# Altium PCB Copy of STM32_PCB.PcbDoc
Units mil, origin at the board's own origin, x right, y up, seen from the top; angles counter-clockwise.
Board outline 1427.35 x 1387.98 mil, 4 copper layers (L1(SIGNAL), L2(GND), L3(GND), L4(SIGNAL)), stack 59.764 mil thick; 35 components, 27 nets, 167 pads, 73 vias.
Unrouted connection lines stored in the file: 8.
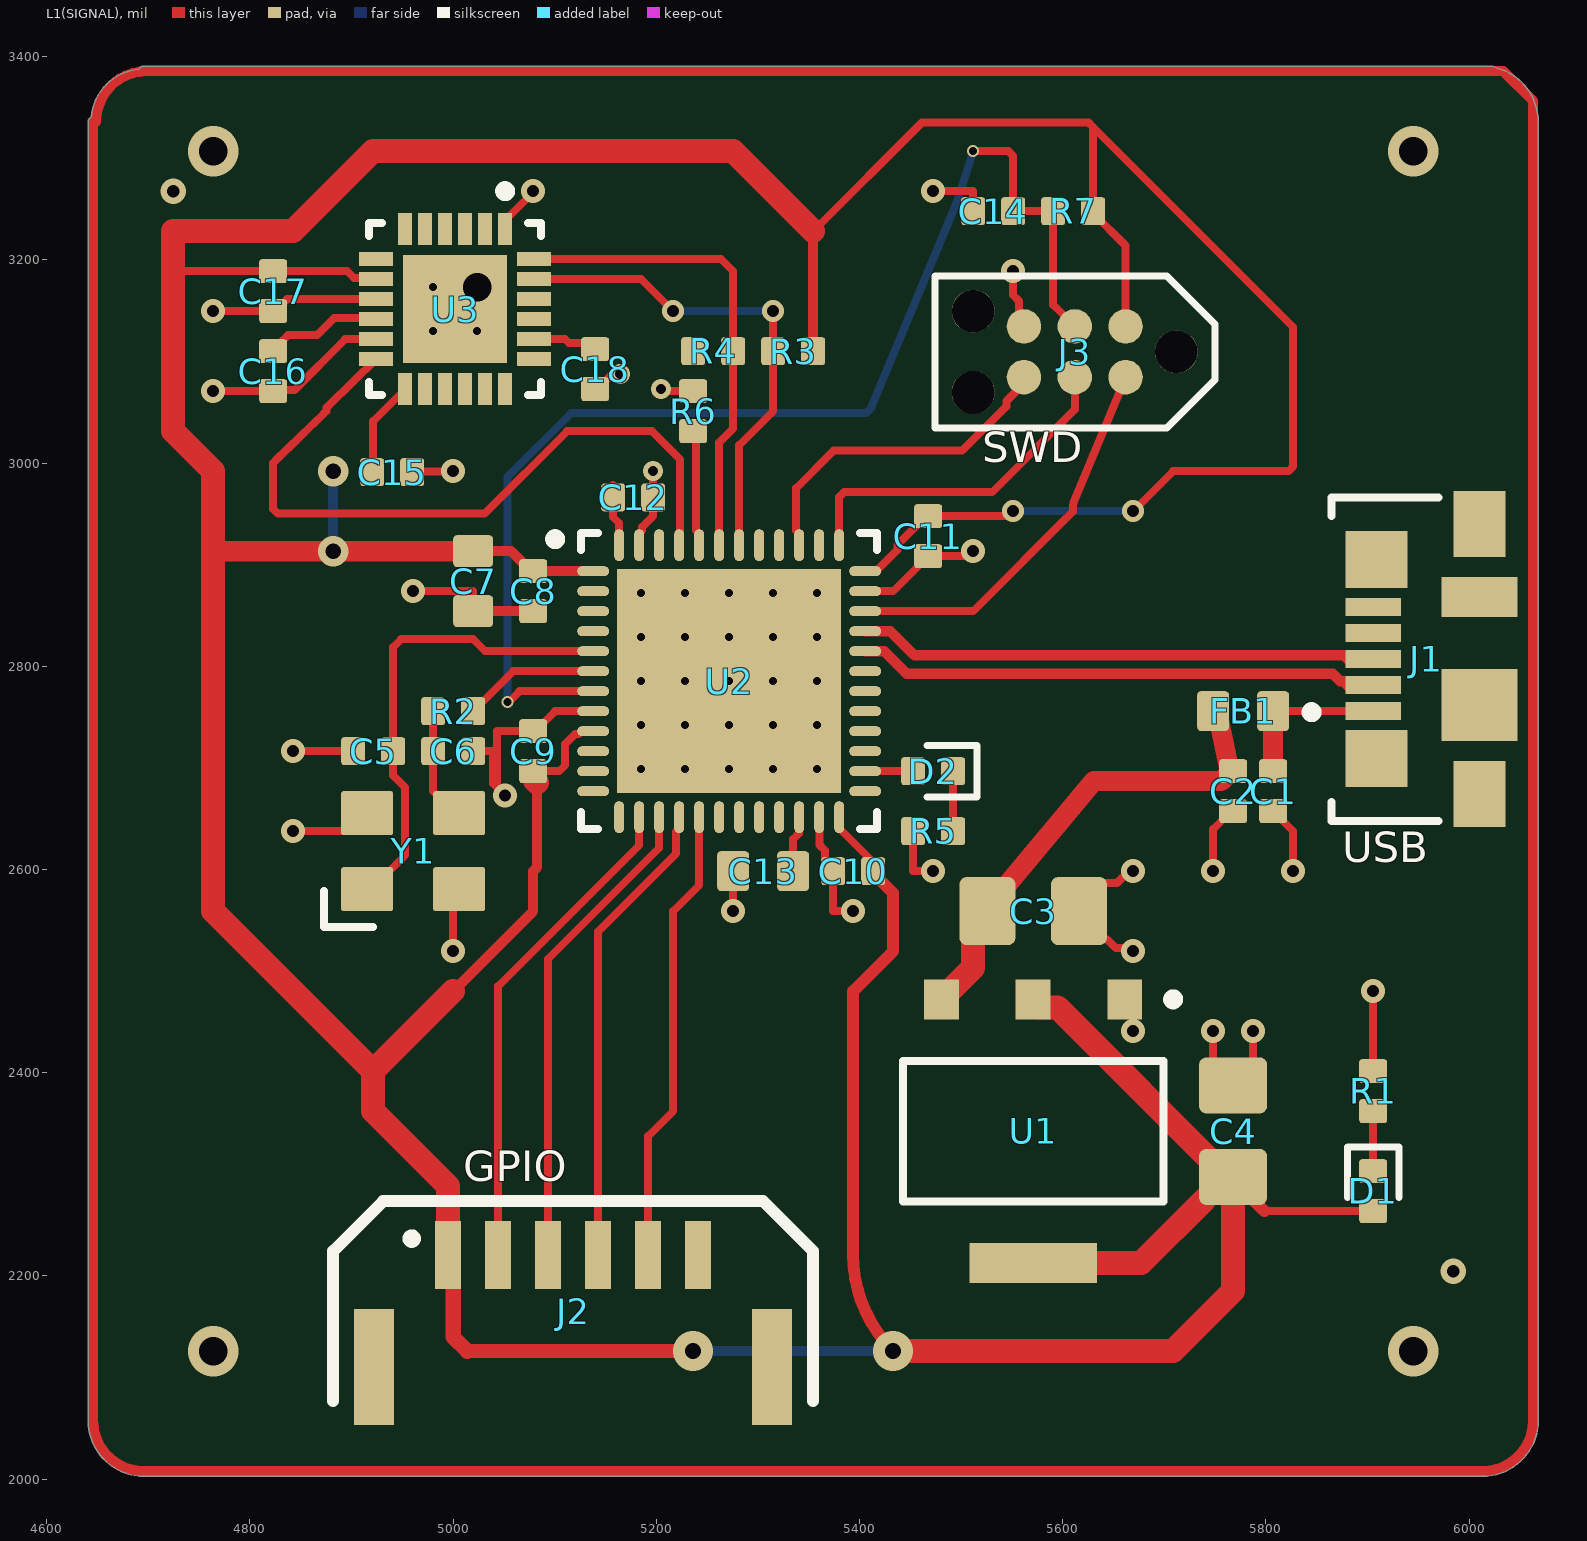
[diagram p0: L1(SIGNAL) view]
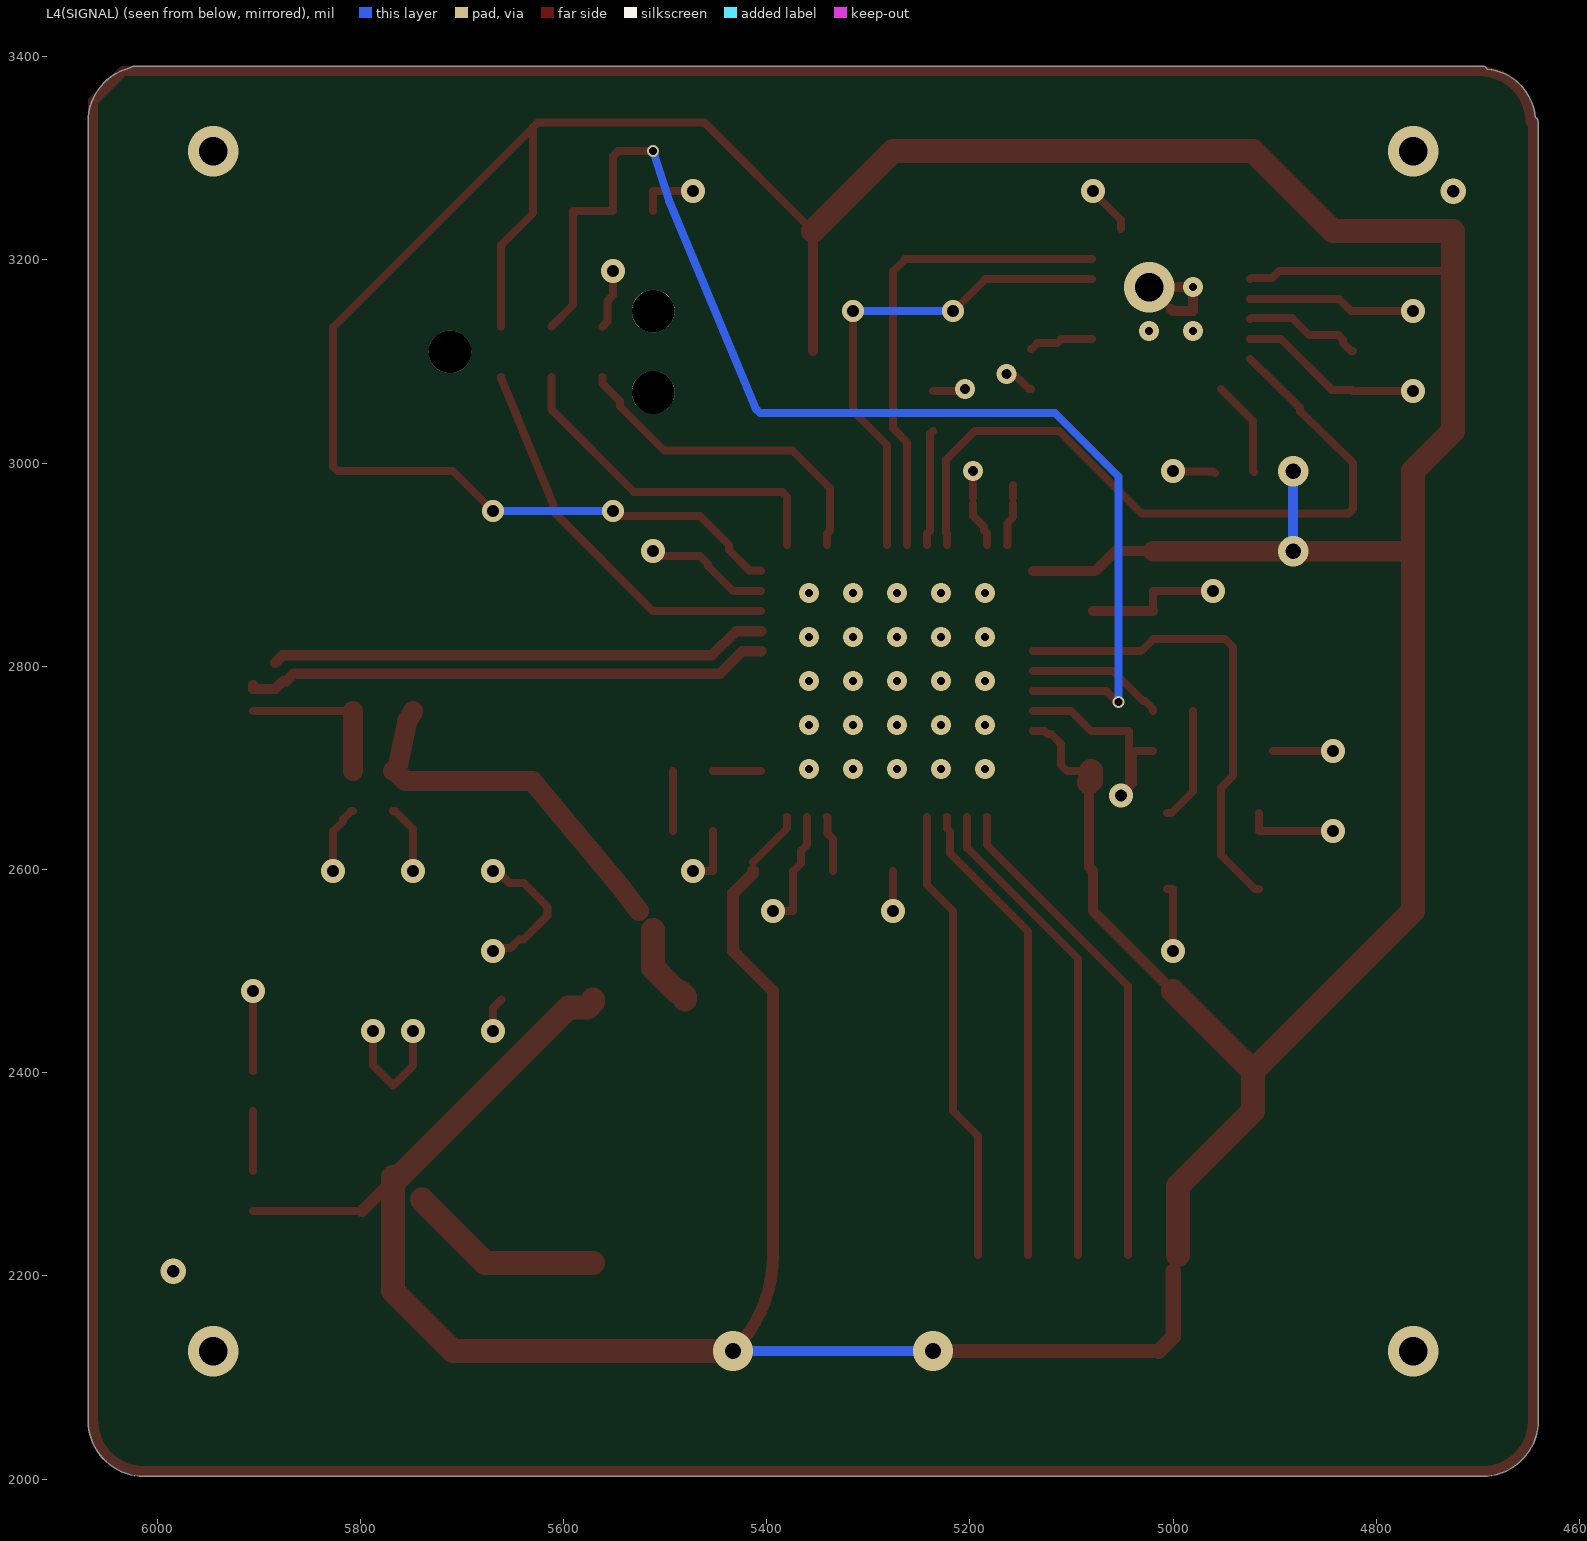
[diagram p1: L4(SIGNAL) view, seen from below]
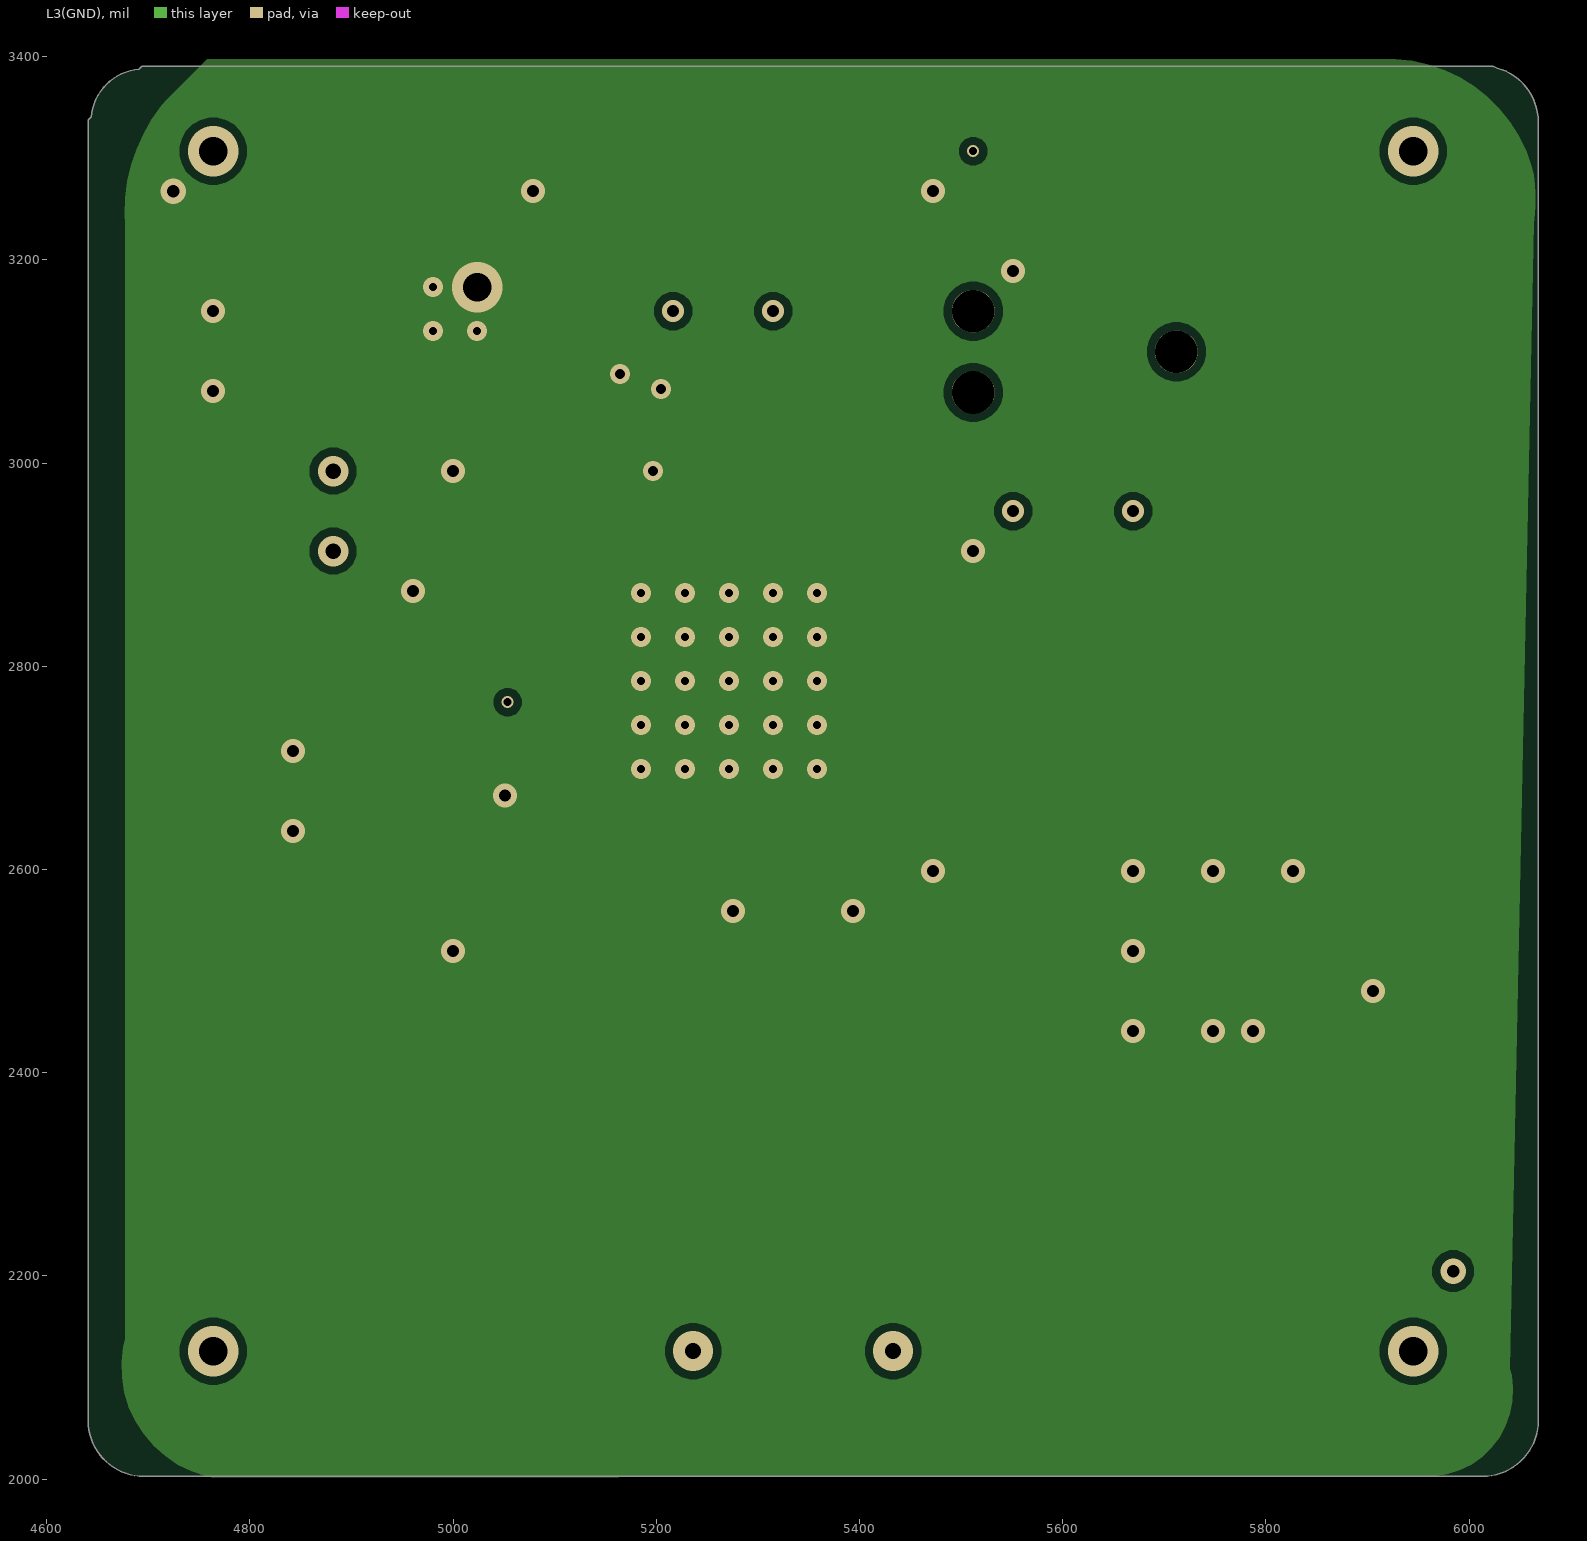
[diagram p2: L3(GND)]

## Layer stack, top to bottom
Top Solder: solder mask 1, SM-001, Dk 4
L1(SIGNAL): signal copper 0.3543
Dielectric 1: prepreg 7.874, PP-017, Dk 4.6
L2(GND): signal copper 0.689
Dielectric 3: core 41.9291, Core-039, Dk 4.6
L3(GND): signal copper 0.689
Dielectric 5: prepreg 7.874, PP-017, Dk 4.6
L4(SIGNAL): signal copper 0.3543
Bottom Solder: solder mask 1, SM-001, Dk 4

## Board outline
4640.65,2057.87 4640.65,3335.83 cw(c4645.67,3335.83) 4643.61,3340.4 cw(c4695.67,3335.83) 4691.1,3387.89 cw(c4695.67,3385.83) 4695.67,3390.84 6023.62,3390.84 6027.61,3388.86 cw(c6012.99,3335.83) 6068.01,3335.83 6068.01,2057.87 cw(c6012.99,2057.87) 6012.99,2002.86 4695.67,2002.86 cw(c4695.67,2057.87)

## Design rules (kind name [scope] priority, off if disabled: settings)
Clearance [All] p1: gap=7.87 ignorepadtopadclearanceinfootprint=FALSE
DiffPairsRouting [All] p1: maxlimit=7.99 minlimit=7.99 mostfreqgap=7.99 toplayer_minwidth=10.24 toplayer_maxwidth=10.24 toplayer_prefwidth=10.24 midlayer1_minwidth=10.24 midlayer1_maxwidth=10.24 midlayer1_prefwidth=10.24 midlayer2_minwidth=10.24 midlayer2_maxwidth=10.24 midlayer2_prefwidth=10.24 bottomlayer_minwidth=10.24 bottomlayer_maxwidth=10.24 bottomlayer_prefwidth=10.24 maxuncoupledlength=500
PolygonConnect [All] p1: connectstyle=Direct reliefconductorwidth=10 reliefentries=4 polygonreliefangle="90 Angle" airgapwidth=10
RoutingVias [All] p1: holewidth=11.81 width=27.56 viastyle="Through Hole" minholewidth=9.84 minwidth=21.65 maxholewidth=15.75 maxwidth=35.43
SolderMaskExpansion [All] p1: expansion=4 istentingtop=FALSE
SupplyNets "Schematic Supply Nets_4" [InNet('GND')] p1: voltage=0.000
SupplyNets "Schematic Supply Nets_3" [InNet('3V3')] p2: voltage=0.000
SupplyNets "Schematic Supply Nets_2" [InNet('VBUS')] p3: voltage=0.000
SupplyNets "Schematic Supply Nets_1" [InNet('+5V')] p4: voltage=0.000
UnRoutedNet [All] p1: checkbadconnections=TRUE
Width [All] p1: maxlimit=39.37 minlimit=7.87 preferedwidth=10 midlayer1_minwidth=10 midlayer1_maxwidth=10 midlayer2_minwidth=10 midlayer2_maxwidth=10 minimp=50.000000 maximp=50.000000 favimp=50.000000
28 further rules are at their usual default settings.

## Classes and differential pairs
differential pair class *DIFF_USB: USB_D
component class STM32_SCHEMATIC: 33333 C1 C2 C3 C4 C5 C6 C7 C9 C10 C11 C12 C13 C14 C15 C16 C17 D1 D2 FB1 J1 J3 R1 R2 R3 R4 R5 R6 R7 U1 U2 U3 Y1
differential pair USB_D: +USB_D_P -USB_D_N

## Components (designator, comment, footprint, x,y, rotation, side; value= is the part's Value field where it differs from the comment)
C1 "2u2" CAP_0402 5807.09,2677.16 r270 top
C2 "2u2" CAP_0402 5767.72,2677.16 r270 top
C3 "22u" CAP_0805 5570.87,2559.06 r180 top
C4 "22u" CAP_0805 5767.72,2342.52 r270 top
C5 "C0402" CAP_0402 4921.26,2716.54 r180 top
C6 "C0402" CAP_0402 5000,2716.54 r0 top
C7 "2.2u" CAP_0603 5019.69,2883.86 r270 top
C8 "100n" CAP_0402 5078.74,2874.02 r270 top
C9 "100n" CAP_0402 5078.74,2716.54 r90 top
C10 "100n" CAP_0402 5393.7,2598.43 r180 top
C11 "100n" CAP_0402 5467.52,2928.15 r270 top
C12 "100n" CAP_0402 5177.17,2966.3 r0 top
C13 "2u2" CAP_0603 5305.12,2598.43 r180 top
C14 "100n" CAP_0402 5531.5,3248.03 r180 top
C15 "100n" CAP_0402 4939.96,2991.14 r0 top
C16 "100n" CAP_0402 4822.83,3090.55 r270 top
C17 "10n" CAP_0402 4822.83,3169.29 r270 top
C18 "2n2" CAP_0402 5139.76,3092.52 r270 top
D1 "GREEN" LED_0402_GREEN 5905.51,2283.46 r90 top
D2 "RED" LED_0402_RED 5472.44,2696.85 r0 top
FB1 "120R" FB_0603 5777.56,2755.91 r180 top
J1 "473460001" FP-473460001-MFG 5996.46,2807.09 r90 top
J2 "SM06B-GHS-TB" SM06B-GHS-TB 5118.11,2165.35 r0 top
J3 "TC2030-NL" TC2030-NL-FP 5611.81,3109.61 r180 top
R1 "1K" RES_0402 5905.51,2381.89 r270 top
R2 "0R" RES_0402 5000,2755.91 r180 top
R3 "2k2" RES_0402 5334.65,3110.24 r0 top
R4 "2k2" RES_0402 5255.91,3110.24 r180 top
R5 "1K" RES_0402 5472.44,2637.8 r0 top
R6 "10k" RES_0402 5236.22,3051.18 r90 top
R7 "10k" RES_0402 5610.24,3248.03 r180 top
U1 "AMS1117-3.3" FP-AMS1117-IPC_C 5570.87,2342.52 r270 top
U2 "STM32F411CEU6" STM-UFQFPN48_L 5271.65,2785.43 r0 top
U3 "MPU-6050" IS-QFN-24_V 5001.97,3151.57 r270 top
Y1 "24MHz" XTAL_3225 4960.63,2618.11 r0 top

## Footprints (in the part's own frame and the unit in brackets; to place one, negate y for a bottom-side part, rotate by r counter-clockwise, add the part's x,y. Pads: shape width x height; smd on the part's side, far side on the other; paste and mask are expansions set on the pad)
CAP_0402 [mm]
  rrect25% 0.6x0.7 smd: 1(-0.5,0) 2(0.5,0)
  body extent -0.5,-0.26 0.5,0.26, height 0.37
CAP_0603 [mm]
  rrect25% 0.8x1 smd: 1(-0.75,0) 2(0.75,0)
  body extent -0.8,-0.4 0.8,0.4, height 0.51
CAP_0805 [mm]
  rrect25% 1.4x1.7 smd: 1(-1.143,0) 2(1.143,0)
  body extent -1.15,-0.76 1.15,0.79, height 1.01
FB_0603 [mm]
  rrect25% 0.8x1 smd: 1(-0.75,0) 2(0.75,0)
  body extent -0.8,-0.4 0.8,0.4, height 0.81
FP-473460001-MFG [mm]
  rect 0.45x1.38 smd paste+0 mask+0: 1(-1.3,2.31) 2(-0.65,2.31) 3(0,2.31) 4(0.65,2.31) 5(1.3,2.31)
  rect 1.425x1.55 smd paste+0 mask+0: 6(-2.488,2.225) 7(2.487,2.225)
  rect 1.65x1.3 smd paste+0 mask+0: 8(-3.375,-0.35) 11(3.375,-0.35)
  rect 1.8x1.9 smd paste+0 mask+0: 9(-1.15,-0.35)
  rect 1x1.9 smd paste+0 mask+0: 10(1.55,-0.35)
  silkscreen extent -4.04,0.67 4.05,3.97, body extent -4.3,-2.48 4.3,3.45, height 0.25
FP-AMS1117-IPC_C [mm]
  rect 1.004x0.872 smd paste+0 mask+0: 1(-3.295,2.29) 2(-3.295,0) 3(-3.295,-2.29)
  rect 1.004x3.182 smd paste+0 mask+0: 4(3.295,0)
  silkscreen extent -3.42,-3.25 1.75,3.63, body extent -3.9,-3.35 3.9,3.35, height 0.25
IS-QFN-24_V [mm] "QFN, 24-Leads, Body 4x4mm, Pitch 0.5mm, Thermal Pad 2.7x2.6mm"
  rect 0.8x0.35 smd: 1(-2,1.25) 2(-2,0.75) 3(-2,0.25) 4(-2,-0.25) 5(-2,-0.75) 6(-2,-1.25) 13(2,-1.25) 14(2,-0.75) 15(2,-0.25) 16(2,0.25) 17(2,0.75) 18(2,1.25)
  rect 0.35x0.85 smd mask+0.102: 7(-1.25,-1.975) 8(-0.75,-1.975) 9(-0.25,-1.975) 10(0.25,-1.975) 11(0.75,-1.975) 12(1.25,-1.975) 19(1.25,1.975) 20(0.75,1.975) 21(0.25,1.975) 22(-0.25,1.975) 23(-0.75,1.975) 24(-1.25,1.975)
  rect 2.7x2.6 smd: 25(0,0)
  silkscreen extent -3.07,-2.15 2.15,2.15, body extent -2,-2 2,2, height 0.95
LED_0402_GREEN [mm]
  rrect25% 0.6x0.7 smd: A(-0.5,0) K(0.5,0)
  silkscreen extent -0.15,-0.65 1.1,0.65, body extent -0.51,-0.25 0.51,0.25, height 0.45
LED_0402_RED [mm]
  rrect25% 0.6x0.7 smd: A(-0.5,0) K(0.5,0)
  silkscreen extent -0.15,-0.65 1.1,0.65, body extent -0.51,-0.25 0.51,0.25, height 0.45
RES_0402 [mm]
  rrect25% 0.6x0.7 smd: 1(-0.5,0) 2(0.5,0)
  body extent -0.5,-0.25 0.5,0.25, height 0.3
SM06B-GHS-TB [mm]
  rect 0.65x1.7 smd: 1(-3.125,1.4) 2(-1.875,1.4) 3(-0.625,1.4) 4(0.625,1.4) 5(1.875,1.4) 6(3.125,1.4)
  rect 1x2.9 smd: ""(-4.975,-1.4) ""(4.975,-1.4)
  silkscreen extent -6,-2.25 6,2.75, body extent -5.38,-2.8 5.38,2.05, height 4.26
STM-UFQFPN48_L [mm] "QFN, 48-Leads, Body 7.1x7.1mm, Pitch 0.5mm, Thermal Pad 5.6x5.6mm, IPC High Density"
  oval 0.8x0.25 smd: 1(-3.4,2.75) 2(-3.4,2.25) 3(-3.4,1.75) 4(-3.4,1.25) 5(-3.4,0.75) 6(-3.4,0.25) 7(-3.4,-0.25) 8(-3.4,-0.75) 9(-3.4,-1.25) 10(-3.4,-1.75) 11(-3.4,-2.25) 12(-3.4,-2.75) 25(3.4,-2.75) 26(3.4,-2.25) 27(3.4,-1.75) 28(3.4,-1.25) 29(3.4,-0.75) 30(3.4,-0.25) 31(3.4,0.25) 32(3.4,0.75) 33(3.4,1.25) 34(3.4,1.75) 35(3.4,2.25) 36(3.4,2.75)
  oval 0.25x0.8 smd: 13(-2.75,-3.4) 14(-2.25,-3.4) 15(-1.75,-3.4) 16(-1.25,-3.4) 17(-0.75,-3.4) 18(-0.25,-3.4) 19(0.25,-3.4) 20(0.75,-3.4) 21(1.25,-3.4) 22(1.75,-3.4) 23(2.25,-3.4) 24(2.75,-3.4) 37(2.75,3.4) 38(2.25,3.4) 39(1.75,3.4) 40(1.25,3.4) 41(0.75,3.4) 42(0.25,3.4) 43(-0.25,3.4) 44(-0.75,3.4) 45(-1.25,3.4) 46(-1.75,3.4) 47(-2.25,3.4) 48(-2.75,3.4)
  rect 5.6x5.6 smd: 49(0,0)
  silkscreen extent -4.47,-3.7 3.7,3.7, body extent -3.55,-3.55 3.55,3.55, height 0.6
TC2030-NL-FP [mil]
  round 33.98 smd paste-16.99: 1(-50,-25) 2(-50,25) 3(0,-25) 4(0,25) 5(50,-25) 6(50,25)
  round 42.01 hole 42.01 unplated: MH(-100,0) MH(100,-40) MH(100,40)
  silkscreen extent -138,-75 138,75
XTAL_3225 [mm]
  rrect10% 1.3x1.1 smd: 1(-1.15,-0.95) 2(1.15,-0.95) 3(1.15,0.95) 4(-1.15,0.95)
  silkscreen extent -2.23,-1.89 -1,-1, body extent -1.6,-1.28 1.6,1.22, height 0.61

## Part data
C1 C2 C5 C6 C8 C9 C10 C11 C12 C14 C15 C16 C17 C18: library part CAP_0402, "Capacitor SMD 0402"
C3 C4: library part CAP_0805, "Capacitor SMD 0805"
C7 C13: library part CAP_0603, "Capacitor SMD 0603"
D1: library part LED_0402_GREEN, "LED 0402 GREEN SMD"
D2: library part LED_0402_RED, "LED 0402 RED SMD"
FB1: library part FB_0603, "Ferrite Bead SMD 0603"
J1: library part CMP-2000-05246-2, "CONN RCPT USB2.0 MICRO B SMD R/A", Current Rating=1.8A, Manufacturer=Molex, Package=0, Temperature="-30°C to +85°C", Temperature Range High=+85°C, Temperature Range Low=-30°C, Voltage Rating=30V, Automotive=No, Category=Conn, ComponentLink2Description=Datasheet, ComponentLink2URL=https://www.molex.com/webdocs/datasheets/pdf/en-us/0473460001_IO_CONNECTORS.pdf, Conn Orientation="Right Angle", Contact Material=Gold,Nickel, Device Class L1=Connectors, Device Class L2="USB Connectors", Device Class L3=unset, Digikey Description="CONN RCPT USB2.0 MICRO B SMD R/A", Footprint Url=https://www.molex.com/pdm_docs/sd/473460001_sd.pdf, Height=2.945mm, Is Female=yes, Lead Free=Yes, Manufacturer Part Number=473460001, Number Of Contacts=5, Octopart=https://octopart.com/47346-0001-molex-7164928, Pitch=0.65mm, RoHS=TRUE, Shielding=true, Usb Standard="USB 2.0"
J2: "Header Connector 6 Position 1.25MM Pitch SMD Horizontal JST GH", Manufacturer=JST, Manufacturer Part Number=SM06B-GHS-TB
J3: "Tag-Connect No-Solder SWD Debug Connector (No Legs) DO NOT PLACE", Manufacturer=Tag-Connect, Manufacturer Part Number=TC2030-NL-FP
R1 R2 R3 R4 R5 R6 R7: library part RES_0402, "Resistor SMD 0402"
U1: library part CMP-209535-000001-1, "LDO Voltage Regulators 1A, 3.3V", Dropout Voltage=1.1V, Manufacturer="Advanced Monolithic Systems", Max Junction Temp=+125°C, Max Power Dissipation=1.2W, Max Supply Voltage=15V, Nominal Supply Current=5mA, Output Current=1A, Output Voltage=3.3V, Package=AMS1117, Temperature="-40°C to +125°C", Temperature Range Low=-40°C, Automotive=No, Category=IC, ComponentLink2Description=Datasheet, ComponentLink2URL=http://www.advanced-monolithic.com/pdf/ds1117.pdf, Device Class L1="Integrated Circuits (ICs)", Device Class L2="Power Management ICs", Device Class L3="Voltage Regulators - Linear", Height=1.8mm, Ipc Land Pattern Name=SOT229P700X180-4, Lead Free=Yes, Manufacturer Part Number=AMS1117-3.3, Number Of Outputs=1, Octopart=https://octopart.com/ams1117-3.3-advanced+monolithic+systems-25899300, Output Type=Fixed, RoHS=TRUE, Standoff Height=0.64mm, Temperature Range High=+125°C
U2: library part CMP-0243-00165-1, "ARM Cortex-M4 32-bit MCU+FPU, 512 KB Flash, 128 KB RAM, 36 I/Os, 48-Pin UFQFPN, -40 to 85 degC, Tray", I/Os (High Current)=36, Operating Frequency(F) (Processor speed) (MHz)=100, Package Description=UFQFPN48, Package Reference="48-Pin Ultra Thin Fine Pitch Quad Flat No-Lead, 7 x 7 x 0.6 mm Body, 0.5 mm Pitch, Exposed Pad", Supply Voltage(Vcc) min (V)=1.7, ComponentLink1Description="Manufacturer URL", ComponentLink1URL=http://www.st.com/, ComponentLink2Description=Datasheet, ComponentLink2URL=http://www.st.com/st-web-ui/static/active/en/resource/technical/document/datasheet/DM00115249.pdf, Core="ARM Cortex-M4", DatasheetVersion="Rev. 6", FLASH Size (Prog) (kB)=512, Internal RAM Size (kB)=128, Mounting Technology="Surface Mount", Packing=Tray
U3: library part CMP-1753-00002-2, "3-Axis Gyroscope, Accelerometer and a Digital Motion Processor(TM) (DMP), 2.375 to 3.46 V, -40 to 85 degC, 24-Pin QFN, RoHS, Tape and Reel", Manufacturer=InvenSense, Standard Package=5,000, Category=Sensors,Transducers, Datasheet URL=http://datasheet.octopart.com/MPU-6050-InvenSense-datasheet-14421344.pdf, Datasheet Version="Rev. 3.3, 05/2012", Dynamic Catalog=MPU-6000™Series, Family=Multifunction, Featured Product=MPU-60506-Axis,IntegratedI²CSolution, Manufacturer URL=http://www.invensense.com/, Online Catalog=MPU-6000™Series, Other Names="1428-1007-2 / MPU6050", Output Type=Digital, Sensor Type=MotionTracking, Unit PriceUSD=Digital
Y1: library part TSX-3225_24.0000MF15X-AC, "Crystal SMD 24MHz 10PPM 7pF 3225", Manufacturer=Epson, Manufacturer Part Number="TSX-3225 24.0000MF15X-AC"

## Free pads (board coordinates)
  oval 60x19.68 hole 30: 5(393.7,196.85)

## Via types
v1: diameter 19.68, hole 7.87, L1(SIGNAL) to L4(SIGNAL), 29 vias
v2: diameter 23.62, hole 11.81, L1(SIGNAL) to L4(SIGNAL), 24 vias
v3: diameter 50, hole 28, L1(SIGNAL) to L4(SIGNAL), 5 vias
v4: diameter 21.65, hole 11.81, L1(SIGNAL) to L4(SIGNAL), 4 vias
v5: diameter 19.68, hole 9.84, L1(SIGNAL) to L4(SIGNAL), 3 vias
v6: diameter 39.37, hole 15.75, L1(SIGNAL) to L4(SIGNAL), 2 vias
v7: diameter 30, hole 15, L1(SIGNAL) to L4(SIGNAL), 2 vias
v8: diameter 25, hole 12, L1(SIGNAL) to L4(SIGNAL), 2 vias
v9: diameter 11.81, hole 7.87, L1(SIGNAL) to L4(SIGNAL), 2 vias

## Nets (pads, with @x,y where several pads share a name; then routed paths per layer and width w, separated by ;. In a path a pad name is that pad's centre, name@x,y a point inside that pad or via, vN(x,y) a via of type N, cw(c..) or ccw(c..) an arc to the next point about the centre after c; other vN are vias at no path point)
3V3: C4.2 C7.1 C8.1 C9.1 C10.1 C11.1 C12.1 C15.1 C17.1 D1.A J2.1 J3.1 R3.2 R4.2 R7.1 U1.2 U1.4 U2.1 U2.9 U2.24 U2.36 U2.48 U3.8 U3.13 | length 6785.8
  L1(SIGNAL) w7.87: 4724.41,3188.98 C17.1 4895.7,3188.98 4902.59,3182.09 4923.23,3182.09 U3.8 ; C15.1 4921.26,2992.13 4921.26,3041.34 U3.13 ; C9.1 5080.71,2696.85 5104.33,2696.85 5110.24,2702.76 5110.24,2723.47 5120.04,2733.27 5123.48,2733.27 5126.44,2736.22 U2.9 ; C12.1@5157.48,2960.16 5157.48,2946.85 5163.01,2941.32 5163.01,2919.67 U2.48 ; C12.1 C12.1@5157.48,2978.58 ; 5354.33,3228.35 5461.31,3335.32 5625.31,3335.32 5629.92,3330.71 ; U2.24 5379.92,2640.75 C10.1@5413.39,2607.28 ; U2.36 5406.15,2894.34 5416.98,2894.34 5437.33,2914.69 5437.33,2919.61 5465.55,2947.83 C11.1 5546.26,2947.83 v4(5551.18,2952.76) ; J3.1 5661.81,3214.17 5629.92,3246.06 R7.1 5629.92,3330.71 ; v4(5669.29,2952.76) 5708.66,2992.13 5822.16,2992.13 5826.77,2996.74 5826.77,3133.86 5629.92,3330.71 ; 5727.77,2263.78 5739.06,2275.07 C4.2@5739.36,2275.07 ; 5798.5,2263.78 D1.A
  L1(SIGNAL) w10: 5000,2480.32 5078.74,2559.06 5078.74,2598.43 5082.68,2602.36 C9.1@5082.68,2685.79 ; C7.1 5057.09,2913.39 5076.77,2893.7 C8.1 U2.1 ; R3.2 5354.33,3228.35
  L1(SIGNAL) w11.81: 5393.7,2221.03 ccw(c5528.12,2221.03) v6(5433.07,2125.98) ; 5393.7,2221.08 5393.7,2480.31 5433.07,2519.69 5433.07,2576.77 5413.39,2596.46 C10.1 ; C4.2@5764.76,2297.52 5767.72,2294.57 5798.5,2263.78
  L1(SIGNAL) w13.62: 5013.84,2125.98 v6(5236.22,2125.98)
  L1(SIGNAL) w15: J2.1@5000,2204.72 5000,2139.82 5013.84,2125.98
  L1(SIGNAL) w20: 4763.78,2913.39 v7(4881.89,2913.39) C7.1
  L1(SIGNAL) w23.62: J2.1 4995.08,2288.39 4921.26,2362.2 4921.26,2401.57 ; 5000,2480.32 4921.26,2401.57 ; C9.1@5080.71,2696.85 5080.71,2687.76 C9.1@5082.68,2685.79 ; 5354.33,3228.35 5275.59,3307.09 4921.26,3307.09 4842.52,3228.35 4724.41,3228.35 4724.41,3188.98 4724.41,3031.5 4763.78,2992.13 4763.78,2913.39 4763.78,2559.05 4921.26,2401.57 ; v6(5433.07,2125.98) 5708.66,2125.98 5767.72,2185.04 5767.72,2294.57 C4.2 ; U1.4 5677.09,2212.8 C4.2@5739.36,2275.07 ; U1.2 5570.87,2469.64 5576.22,2464.29 5595.05,2464.29 5761.81,2297.52 C4.2@5764.76,2297.52
  L4(SIGNAL) w7.87: v4(5551.18,2952.76) v4(5669.29,2952.76)
  L4(SIGNAL) w10: v7(4881.89,2913.39) v7(4881.89,2992.13) ; v6(5236.22,2125.98) v6(5433.07,2125.98)
+5V: C2.1 C3.2 FB1.2 U1.3 | length 453.5
  L1(SIGNAL) w19.68: C3.2 5543.58,2582.68 5630.72,2687.01 5755.9,2687.01 5765.75,2696.85 C2.1 5763.78,2698.82 5753.94,2746.06 FB1.2
  L1(SIGNAL) w23.62: U1.3 5480.71,2474.85 5486.07,2480.2 5488.67,2480.2 5511.81,2503.35 C3.2@5511.81,2540.69
GND: C1.2 C2.2 C3.1 C4.1 C5.2 C6.2 C7.2 C8.2 C9.2 C10.2 C11.2 C12.2 C13.2 C14.2 C15.2 C16.2 C17.2 C18.2 J1.5 J2.6 J3.5 R1.1 R5.1 R6.2 U1.1 U2.8 U2.23 U2.35 U2.47 U2.49 U3.1 U3.9 U3.11 U3.18 U3.25 Y1.2 Y1.4 | length 3539.6
  L1(SIGNAL) w7.87: v2(4763.78,3070.87) C16.2 4824.13,3072.16 4843.81,3072.16 4893.7,3122.05 U3.11 ; v2(4763.78,3149.61) C17.2 ; C17.2@4824.8,3149.61 4836.61,3161.42 U3.9 ; v2(4842.52,2637.8) 4915.35,2637.8 Y1.4 ; v2(4842.52,2716.54) C5.2 ; C15.2@4958.66,2990.16 4960.14,2991.63 4999.51,2991.63 v2(5000,2992.13) ; v2(4960.63,2874.02) 5019.68,2874.02 C7.2 ; v2(5000,2519.69) 5000,2580.71 Y1.2 ; C6.2 5039.37,2716.54 5039.37,2684.73 5043.31,2680.79 5043.31,2736.22 C9.2 ; U3.1 5051.18,3239.17 5078.74,3266.73 v2(5078.74,3267.72) ; C9.2@5080.71,2736.22 5100.39,2755.91 U2.8 ; C18.2 5141.73,3072.83 5154.46,3085.56 5161.97,3085.56 v5(5164.23,3087.82) ; U2.47 5183.07,2930.65 5186.02,2933.61 5186.02,2937.05 5196.85,2947.88 C12.2@5196.85,2960.16 ; C12.2 v5(5196.85,2992.13) ; v5(5204.72,3072.83) 5204.72,3070.87 R6.2 ; v2(5275.59,2559.06) C13.2 ; U2.23 5360.61,2651.2 5360.61,2624.09 5366.14,2618.56 5366.14,2606.3 C10.2 5374.02,2559.06 v2(5393.7,2559.06) ; U2.35 5433.07,2874.02 5457.68,2898.62 5457.68,2900.59 5465.55,2908.46 C11.2 5511.81,2908.46 v2(5511.81,2913.39) ; R5.1 5452.76,2598.43 v2(5472.44,2598.43) ; v2(5472.44,3267.72) 5511.81,3267.72 C14.2 ; v2(5551.18,3188.98) 5551.18,3165.35 5556.82,3159.72 5556.82,3139.6 J3.5 ; U1.1 5669.29,2463.98 v2(5669.29,2440.94) ; v2(5669.29,2519.69) 5666.28,2522.7 5652.22,2522.7 5643.57,2531.35 5639.26,2531.35 5615.87,2554.75 C3.1 5615.87,2563.36 5639.26,2586.76 5653.37,2586.76 5665.03,2598.43 v2(5669.29,2598.43) ; v2(5748.03,2440.94) 5748.03,2407.2 C4.1 5787.4,2407.21 v2(5787.4,2440.94) ; v2(5748.03,2598.43) 5748.03,2639.76 5765.75,2657.48 C2.2 ; C1.2 5809.05,2657.48 5816.93,2649.61 5816.93,2647.64 5826.77,2637.79 v2(5826.77,2598.43) ; R1.1 v2(5905.51,2480.31)
  L1(SIGNAL) w10: 4698.43,3385.83 6033.7,3385.83 ; U3.25 5000,3149.61 4980.31,3149.61 4980.31,3166.9 4983.48,3170.06 4986.64,3173.23 v3(5023.62,3173.23) ; C7.2 C8.2
  other v1: 5185.04,2698.82 5228.35,2698.82 5271.65,2698.82 5314.96,2698.82 5358.27,2698.82 5185.04,2742.13 5228.35,2742.13 5271.65,2742.13 5314.96,2742.13 5358.27,2742.13 5185.04,2785.43 5228.35,2785.43 5271.65,2785.43 5314.96,2785.43 5358.27,2785.43 5185.04,2828.74 5228.35,2828.74 5271.65,2828.74 5314.96,2828.74 5358.27,2828.74 5185.04,2872.05 5228.35,2872.05 5271.65,2872.05 5314.96,2872.05 5358.27,2872.05 4980.31,3129.92 5023.62,3129.92 4980.31,3173.23 5023.62,3173.23
  other v2: 5051.18,2672.74 4763.78,3149.61
  other v8: 4724.41,3267.72
IMU_CPOUT: C18.1 U3.20 | length 64.1
  L1(SIGNAL) w7.87: U3.20 5110.24,3122.05 5114.17,3118.11 5133.86,3118.11 C18.1
IMU_INT: U2.45 U3.12 | length 722.7
  L1(SIGNAL) w7.87: 4877.7,3056.95 U3.12 ; U2.45 5222.44,2930.65 5223.42,2931.64 5223.42,3003.73 5195.66,3031.5 5157.48,3031.5 5112.2,3031.5 5030.98,2950.27 4827.45,2950.27 4822.83,2954.89 4822.83,2996.84 4822.83,3000.1 4825.21,3002.48 4873.03,3049.17 4875.33,3051.47 4875.37,3054.62 4877.63,3056.88 ; 4877.67,3056.92 ccw(c4883.2,3051.32) 4877.63,3056.88 ; 4877.67,3056.92 ccw(c4883.2,3051.32) 4877.63,3056.88
IMU_REGOUT: C16.1 U3.10 | length 117.2
  L1(SIGNAL) w7.87: C16.1 4824.8,3110.24 4832.68,3118.11 4832.68,3121.37 4837.29,3125.98 4865.99,3125.98 4882.72,3142.72 4923.23,3142.72 U3.10
IMU_SCL: R3.1 U2.42 U3.23 | length 492.5
  L1(SIGNAL) w7.87: U3.23 5185.04,3181.1 v4(5216.54,3149.61) ; U2.42 5281.5,3017.72 5314.96,3051.18 R3.1 v4(5314.96,3149.61)
  L4(SIGNAL) w7.87: v4(5216.54,3149.61) v4(5314.96,3149.61)
IMU_SDA: R4.1 U2.43 U3.24 | length 476.2
  L1(SIGNAL) w7.87: U3.24 5263.78,3200.79 5275.59,3188.98 R4.1 5275.59,3034.08 5261.81,3020.3 U2.43
LED_PWR_K: D1.K R1.2 | length 59.1
  L1(SIGNAL) w7.87: D1.K R1.2
MCU_BOOT0: R6.1 U2.44 | length 114.7
  L1(SIGNAL) w7.87: R6.1 5239.17,3028.54 5239.17,2933.61 5242.13,2930.65 U2.44
mcu_led_A: D2.A U2.26 | length 47.2
  L1(SIGNAL) w7.87: U2.26 D2.A
mcu_led_K: D2.K R5.2 | length 59.1
  L1(SIGNAL) w7.87: R5.2 D2.K
MCU_NRST: C14.1 J3.3 R7.2 U2.7 | length 1226
  L1(SIGNAL) w7.87: v9(5053.58,2764.75) 5054.65,2764.75 5065.49,2775.59 U2.7 ; v9(5511.81,3307.09) 5546.57,3307.09 5551.18,3302.47 C14.1 R7.2 5590.55,3155.87 J3.3
  L4(SIGNAL) w7.87: v9(5053.58,2764.75) 5053.58,2986.65 5116.14,3049.21 5187.88,3049.21 5403.18,3049.21 5406.44,3049.21 5411.05,3053.82 5496.06,3257.93 v9(5511.81,3307.09)
MCU_OSC_IN: C5.1 U2.5 Y1.1 | length 465.9
  L1(SIGNAL) w7.87: Y1.1 4919.29,2580.71 4952.76,2614.17 4952.76,2680.79 4940.94,2692.6 C5.1 4940.94,2818.9 4948.82,2826.77 5019.69,2826.77 5031.5,2814.96 U2.5
MCU_OSC_OUT: R2.1 U2.6 | length 135.6
  L1(SIGNAL) w7.87: R2.1 5019.68,2757.87 5027.56,2765.75 5029.53,2765.75 5059.05,2795.28 U2.6
MCU_PA4: J2.2 U2.14 | length 488.6
  L1(SIGNAL) w7.87: J2.2 5044.29,2485.24 5183.07,2624.01 U2.14
MCU_PA5: J2.3 U2.15 | length 476.4
  L1(SIGNAL) w7.87: J2.3 5093.5,2512.18 5202.76,2621.43 U2.15
MCU_PA6: J2.4 U2.16 | length 464.1
  L1(SIGNAL) w7.87: J2.4 5142.72,2539.12 5219.49,2615.89 5219.49,2637.26 5222.44,2640.21 U2.16
MCU_PA7: J2.5 U2.17 | length 451.9
  L1(SIGNAL) w7.87: J2.5 5191.93,2337.6 5216.54,2362.2 5216.54,2559.06 5242.13,2584.65 U2.17
MCU_SWCLK: J3.4 U2.37 | length 346.9
  L1(SIGNAL) w7.87: U2.37 5379.92,2966.84 5384.53,2971.46 5530.51,2971.46 5611.81,3052.76 J3.4
MCU_SWDIO: J3.2 U2.34 | length 387.5
  L1(SIGNAL) w7.87: U2.34 5511.87,2854.33 5609.9,2952.37 5609.9,2956.76 5610.05,2958.3 5610.5,2960.54 J3.2
MCU_SWO: J3.6 U2.39 | length 333.5
  L1(SIGNAL) w7.87: U2.39 5340.55,2930.65 5337.6,2933.61 5337.6,2975.39 5374.46,3012.26 5500.87,3012.26 5544.63,3056.01 5544.63,3061.06 5561.81,3078.25 J3.6
MCU_VCAP1: C13.1 U2.22 | length 55.6
  L1(SIGNAL) w7.87: C13.1 5334.65,2629.92 5340.18,2635.45 5340.18,2651.2 U2.22
USB_D_N: J1.2 U2.32 | length 519.2
  L1(SIGNAL) w10.24: U2.32 5424.11,2814.96 5446.47,2792.6 5865.6,2792.6 5872.97,2785.24 5876.18,2785.24 5883.66,2777.76 5905.51,2777.76 J1.2
USB_D_P: J1.3 U2.33 | length 491.3
  L1(SIGNAL) w10.24: U2.33 5430.21,2834.65 5454.02,2810.83 5876.37,2810.83 J1.3@5883.85,2803.35
VBUS: C1.1 FB1.1 J1.1 | length 157.5
  L1(SIGNAL) w7.87: FB1.1 J1.1
  L1(SIGNAL) w19.68: C1.1 FB1.1
XTAL_IN: C6.1 R2.2 Y1.3 | length 113.3
  L1(SIGNAL) w7.87: R2.2 C6.1 4980.31,2677.17 5001.97,2655.51 Y1.3
pads on no net: J1.4 J1.6 J1.7 J1.8 J1.9 J1.10 J1.11 J2. J3.MH U2.2 U2.3 U2.4 U2.10 U2.11 U2.12 U2.13 U2.18 U2.19 U2.20 U2.21 U2.25 U2.27 U2.28 U2.29 U2.30 U2.31 U2.38 U2.40 U2.41 U2.46 U3.2 U3.3 U3.4 U3.5 U3.6 U3.7 U3.14 U3.15 U3.16 U3.17 U3.19 U3.21 U3.22
copper on no net: | length 4171
  L1(SIGNAL) w10: 4645.67,3335.83 4645.67,2992.13 4645.67,2057.87 ccw(c4695.67,2057.87) 4695.67,2007.87 6012.99,2007.87 ccw(c6012.99,2057.87) 6062.99,2057.87 6062.99,3356.54 6033.7,3385.83 ; 4648.43,3335.83 cw(c4698.43,3335.83) 4698.43,3385.83
  other v3: 4763.78,2125.98 5944.88,2125.98 4763.78,3307.09 5944.88,3307.09
  other v8: 5984.25,2204.72

## Polygon pours and split planes (outlines as drawn)
GND on L3(GND) "GND_L03_P000" (solid, pour order 0): 4677.19,3236.09 cw(c4845.43,3247.19) 4718.62,3358.31 4757.99,3397.68 5919.54,3397.68 cw(c5919.54,3249.8) 6063.48,3283.74 cw(c5890.56,3259.92) 6063.48,3236.09 6040.07,2108.74 cw(c5958.84,2086.93) 5958.94,2002.83 4764.21,2001.49 cw(c4785.08,2110.74) 4677.2,2137.83

## Silkscreen, mask and mechanical layers (free items; w line width, h text height)
Top Overlay:
  text "SWD" at 5520.81,3001.13 h30
  text "USB" at 5875.14,2607.43 h30
  text "GPIO" at 5010,2293.46 h30

## Text inside footprints (layer, text, board x,y; h text height)
D1: Mechanical 13 "+" at 5885.49,2209.32 h19.68 r90
D2: Mechanical 13 "+" at 5398.3,2716.87 h19.68